# Altium PCB PCB1.PcbDoc
Units mil, origin at the board's own origin, x right, y up, seen from the top; angles counter-clockwise.
Board outline 1425 x 1545 mil, 2 copper layers (Top Layer, Bottom Layer); 12 components, 11 nets, 48 pads, 12 vias.
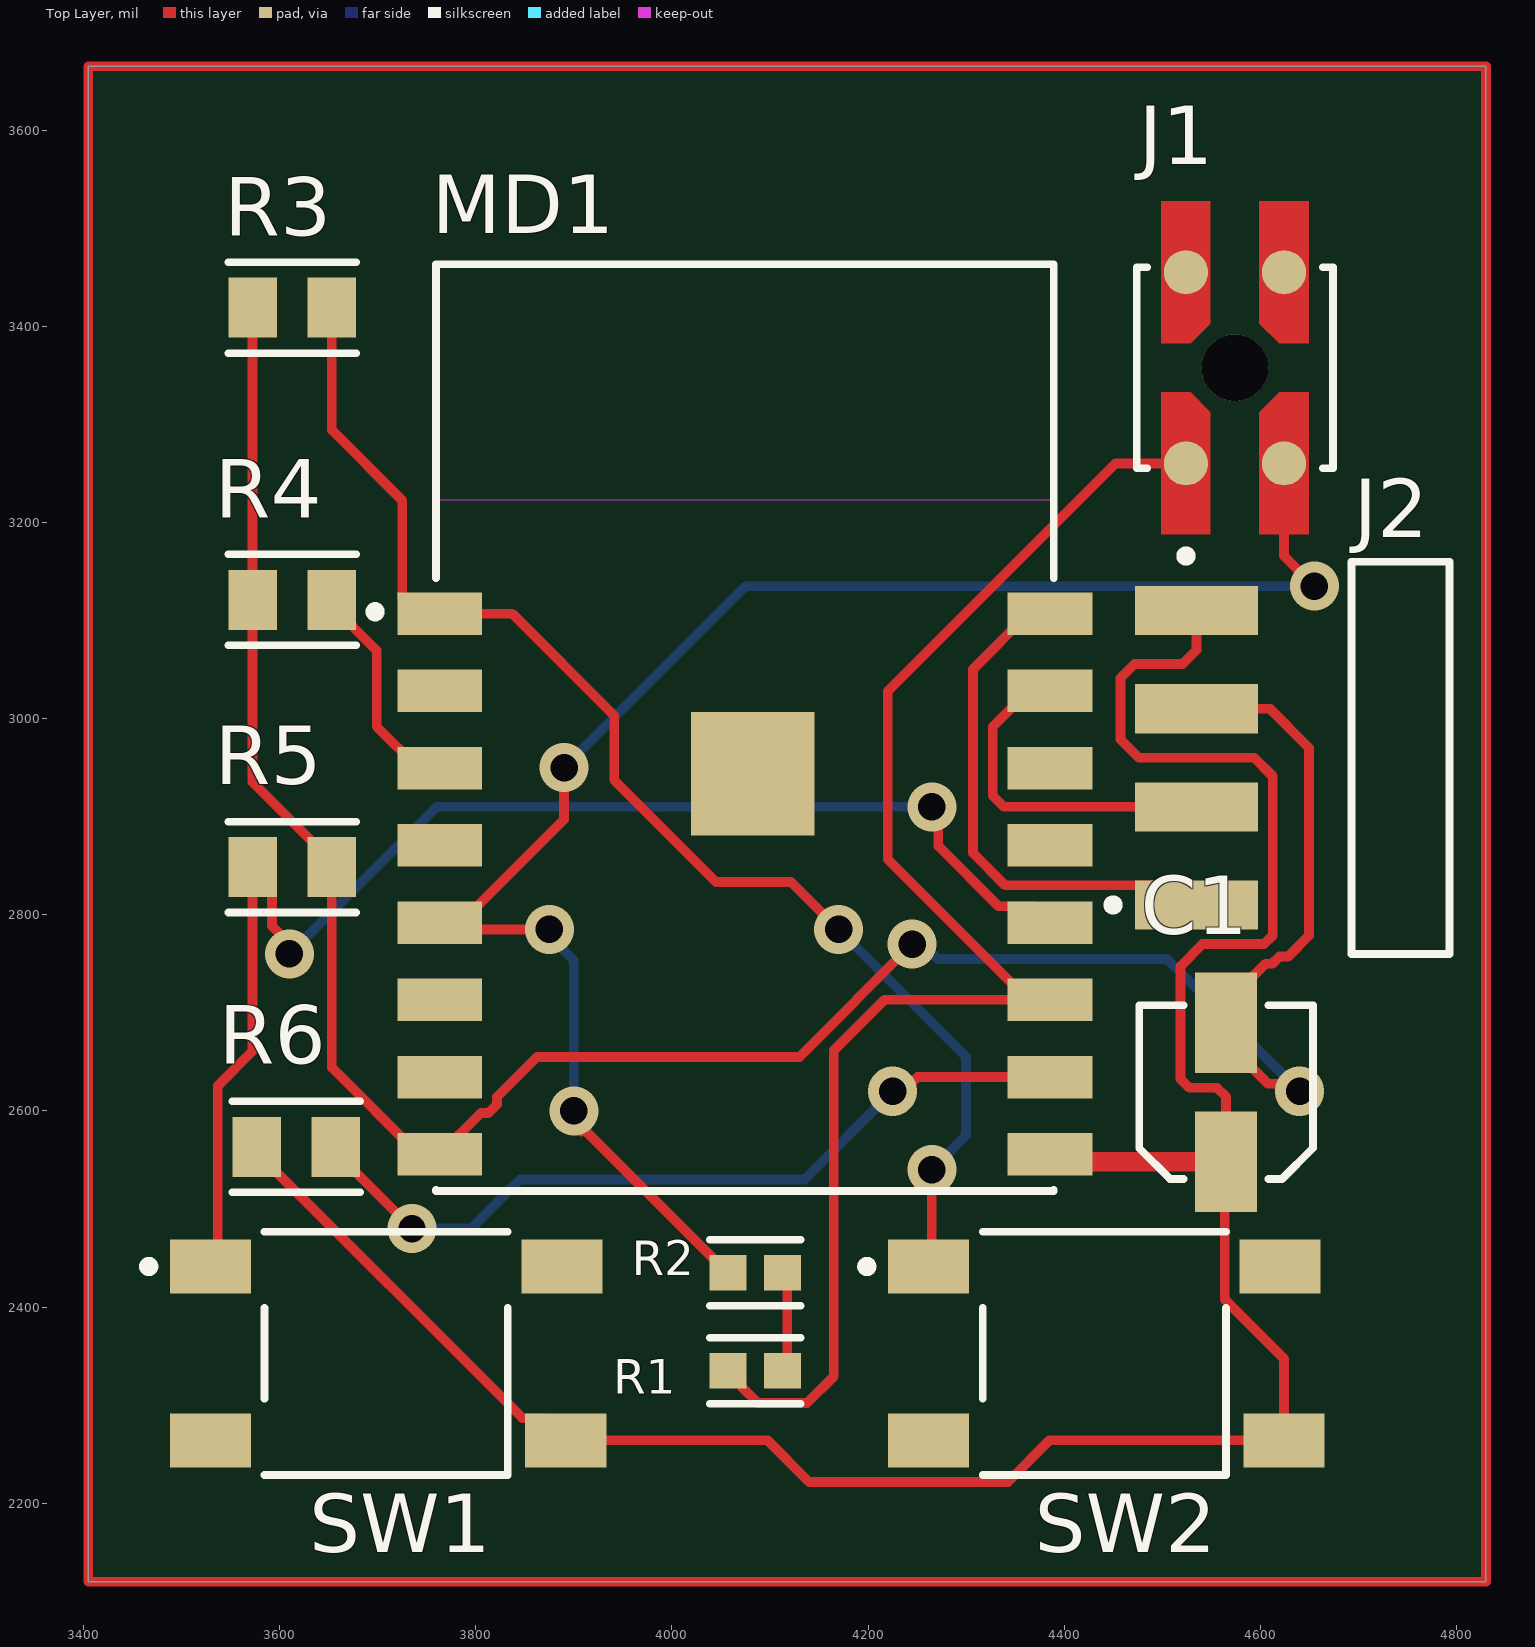
[diagram p0: Top Layer view]
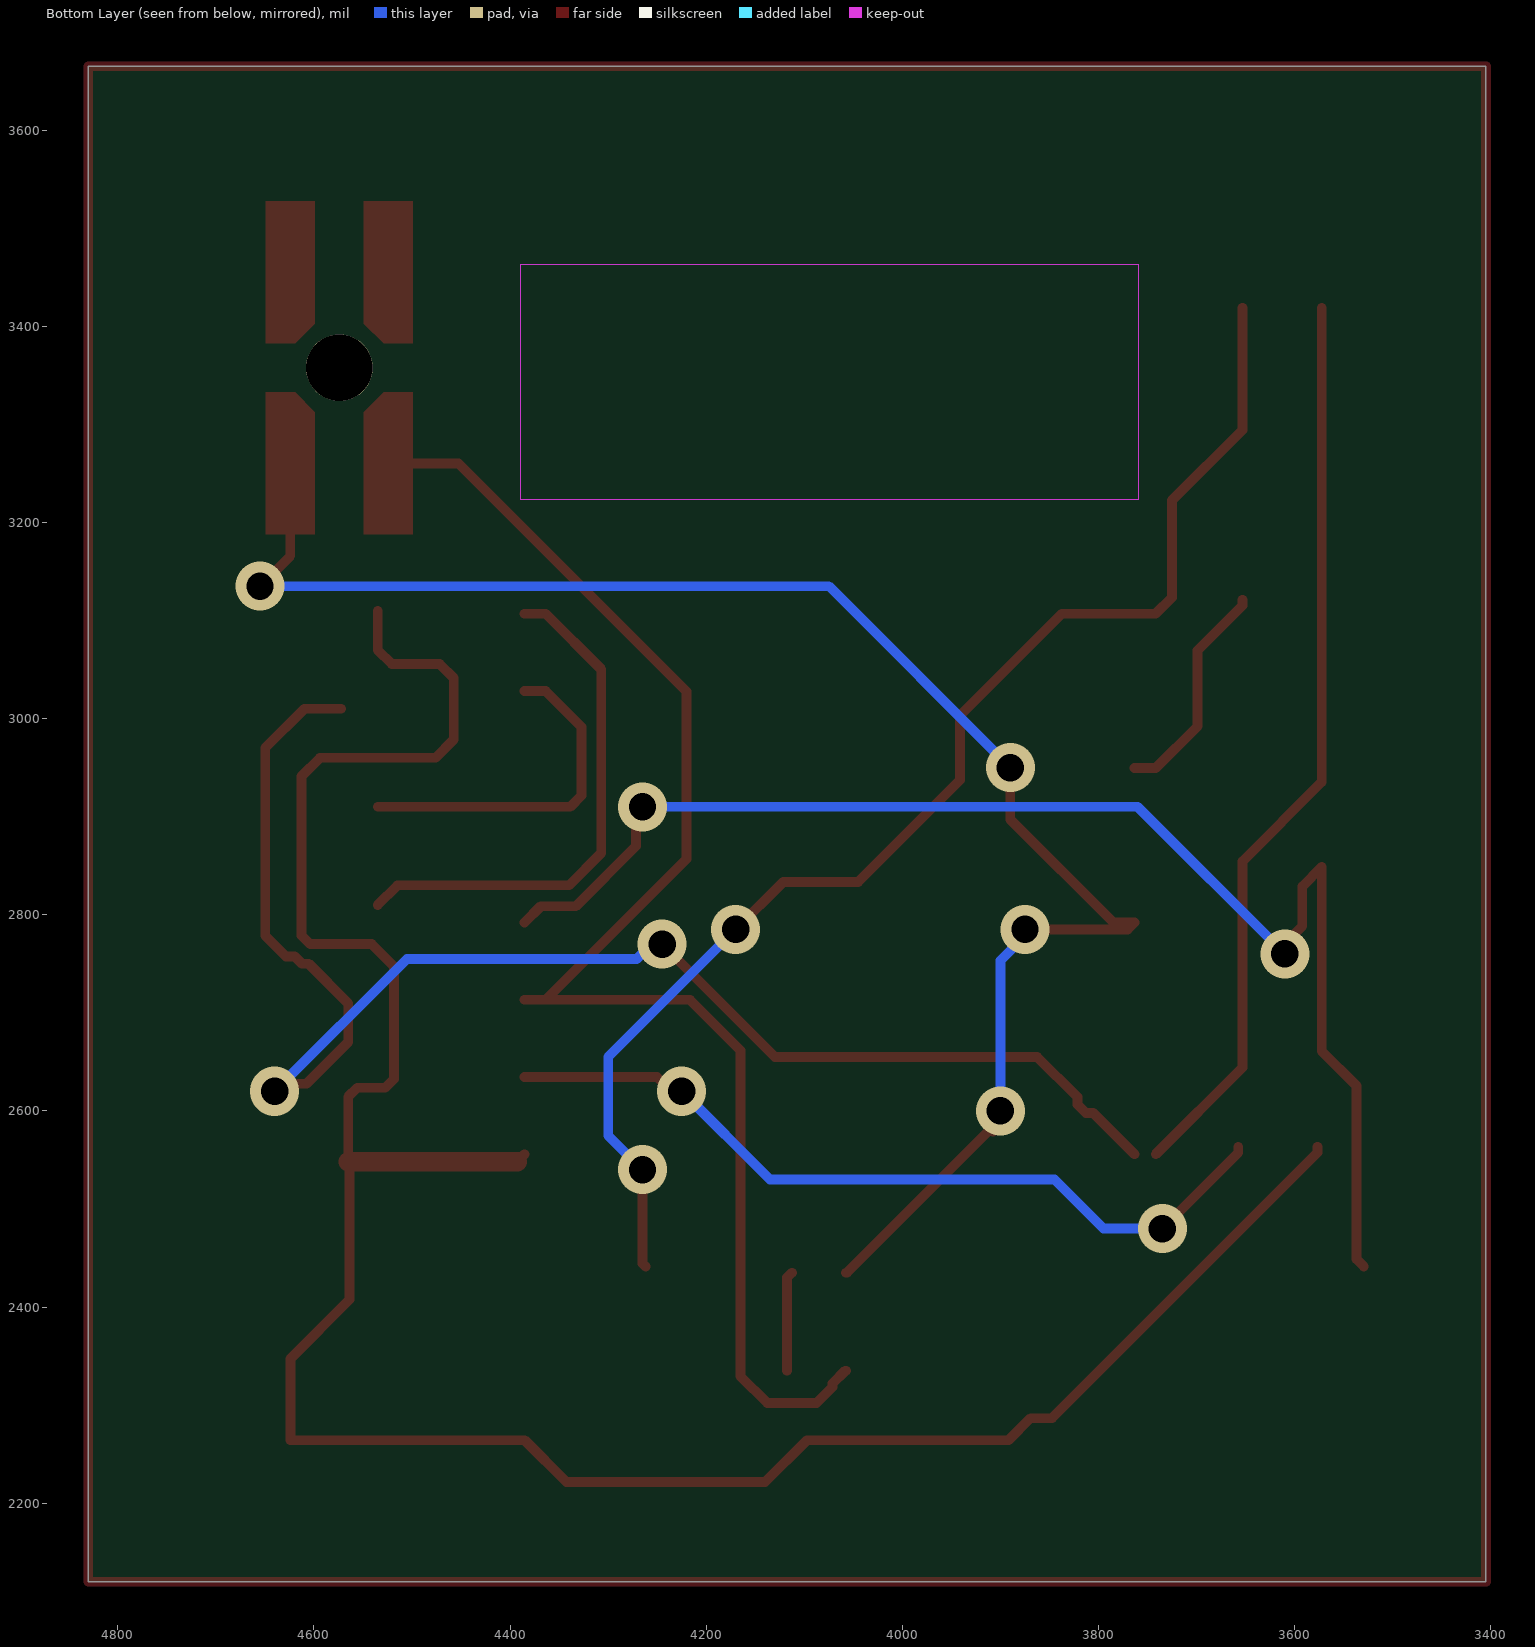
[diagram p1: Bottom Layer view, seen from below]
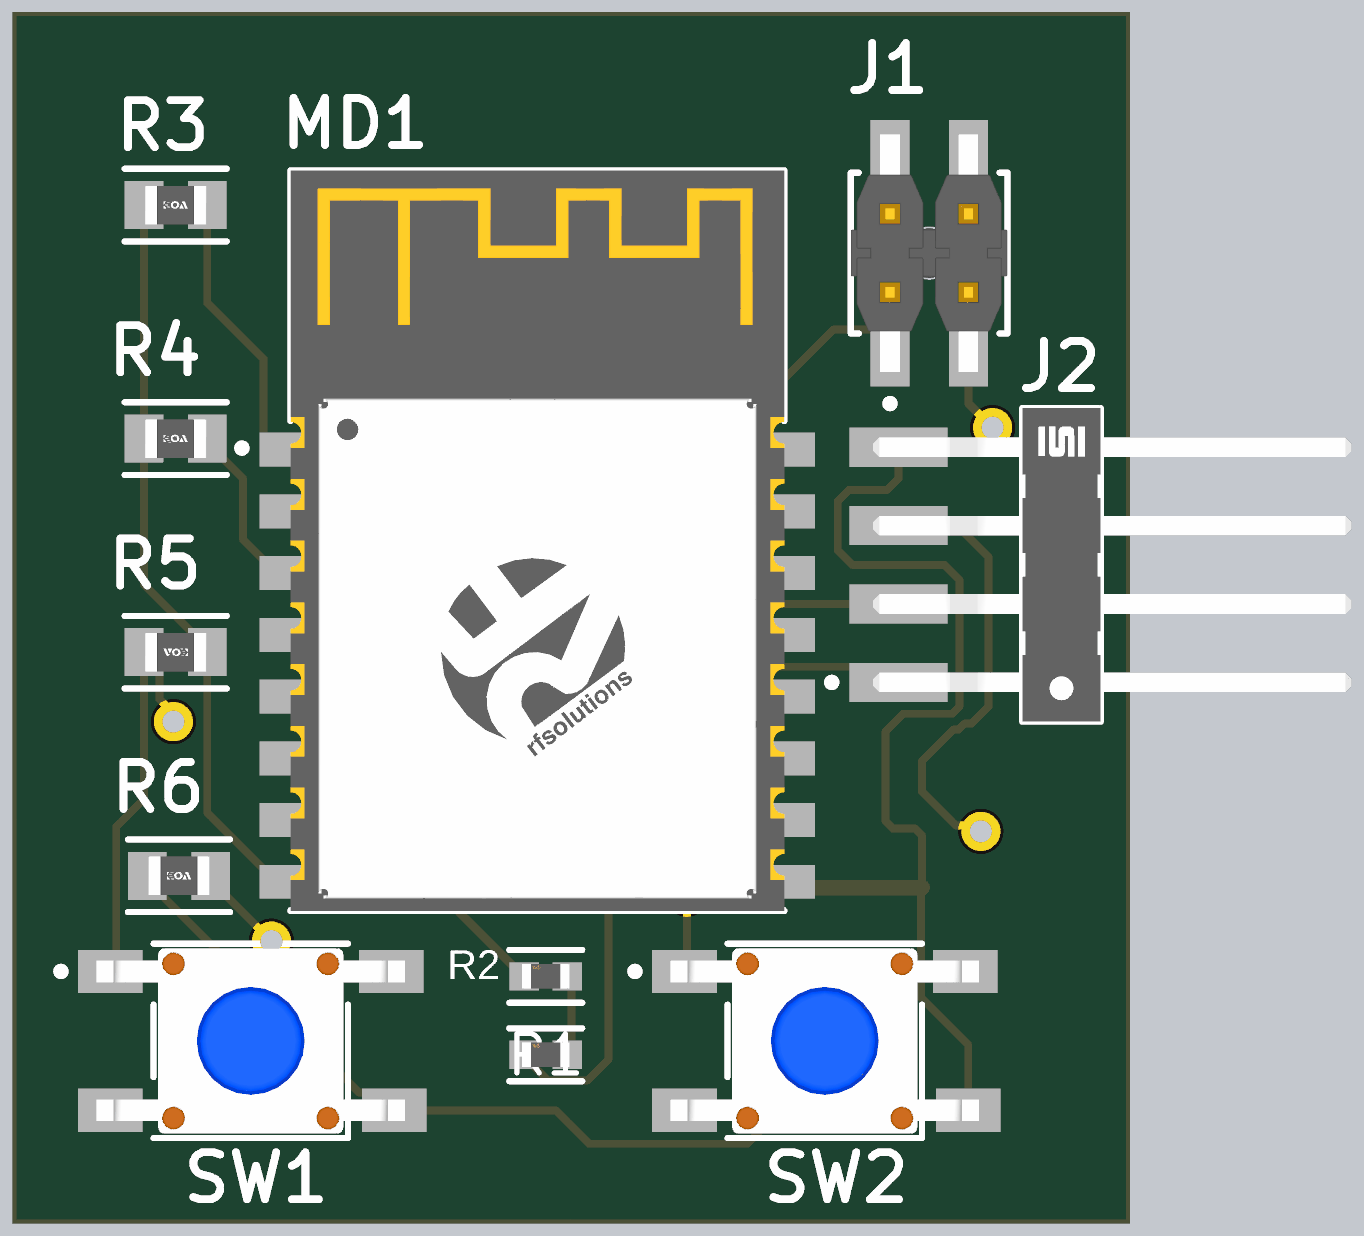
[diagram p2: 3D render of the assembled board from above, using the file's embedded part models]

## Layer stack, top to bottom
Top Solder: solder mask 0.4, Solder Resist, Dk 3.5
Top Layer: signal copper 1.4
Dielectric 1: dielectric 12.6, FR-4, Dk 4.8
Bottom Layer: signal copper 1.4
Bottom Solder: solder mask 0.4, Solder Resist, Dk 3.5

## Board outline
3405,2120 3405,3665 4830,3665 4830,2120

## Design rules (kind name [scope] priority, off if disabled: settings)
Clearance [All] p1: gap=10 ignorepadtopadclearanceinfootprint=FALSE
PolygonConnect [All] p1: connectstyle=Relief reliefconductorwidth=10 reliefentries=4 polygonreliefangle="90 Angle" airgapwidth=10
RoutingVias [All] p1: holewidth=28 width=50 viastyle="Through Hole" minholewidth=28 minwidth=50 maxholewidth=28 maxwidth=50
SolderMaskExpansion [All] p1: expansion=4 istentingtop=FALSE
SupplyNets "Schematic Supply Nets_2" [InNet('+3.3')] p1: voltage=0.000
SupplyNets "Schematic Supply Nets_1" [InNet('GND')] p2: voltage=0.000
SupplyNets "Schematic Supply Nets" [InNet('VCC')] p3: voltage=0.000
Width [All] p1: maxlimit=20 minlimit=10 preferedwidth=10 minimp=50.000000 maximp=50.000000 favimp=50.000000
30 further rules are at their usual default settings.

## Classes and differential pairs
component class Sheet1: C1 J1 MD1 R1 R2 R3 R4 R5 R6 SW1 SW2

## Components (designator, comment, footprint, x,y, rotation, side; value= is the part's Value field where it differs from the comment)
C1 "865250640001" WCAP-ASNP_D4H5.5 54565,-47380.87 r270 top
J1 "TSM-102-01-F-DV-A-P-TR" FP-TSM-102-01-F-DV-A-P-TR-MFG 4574.08,3357.65 r0 top
J2 "TSM-104-02-T-SH-P-TR" FP-TSM-104-02-T-SH-P-TR-MFG 4742.87,2960 r90 top
MD1 "ESP-12S" FP-ESP-12S-MFG 4074.33,2990.79 r0 top
R1 "TFCR0603-10W-C-4701FT" FP-TFCR0603-IPC_B 4085,2335 r0 top
R2 "TFCR0603-10W-C-4701FT" FP-TFCR0603-IPC_B 4085,2435 r0 top
R3 "RN73R2ATTD1002B25" FP-RN73R2A-IPC_A 3612.89,3418.91 r0 top
R4 "RN73R2ATTD1002B25" FP-RN73R2A-IPC_A 3612.89,3121.05 r0 top
R5 "RN73R2ATTD1002B25" FP-RN73R2A-IPC_A 3612.89,2848.54 r180 top
R6 "RN73R2ATTD1002B25" FP-RN73R2A-IPC_A 3617.11,2563.35 r0 top
SW1 "2-1977223-2" FP-2-1977223-2-MFG 3708.66,2352.72 r90 top
SW2 "2-1977223-2" FP-2-1977223-2-MFG 4440.9,2352.72 r90 top

## Footprints (in the part's own frame and the unit in brackets; to place one, negate y for a bottom-side part, rotate by r counter-clockwise, add the part's x,y. Pads: shape width x height; smd on the part's side, far side on the other; paste and mask are expansions set on the pad)
FP-2-1977223-2-MFG [mm]
  rect 1.4x2.1 smd paste+0 mask+0: 1(2.25,4.55) 2(2.25,-4.55) 3(-2.25,4.55) 4(-2.25,-4.65)
  silkscreen extent -3.15,-3.15 3.15,6.27, body extent -3.25,-5.8 3.25,5.7, height 0.25
FP-ESP-12S-MFG [mm]
  rect 2.2x1.1 smd paste+0 mask+0: 1(-7.9,2.95) 2(-7.9,0.95) 3(-7.9,-1.05) 4(-7.9,-3.05) 5(-7.9,-5.05) 6(-7.9,-7.05) 7(-7.9,-9.05) 8(-7.9,-11.05) 9(7.9,-11.05) 10(7.9,-9.05) 11(7.9,-7.05) 12(7.9,-5.05) 13(7.9,-3.05) 14(7.9,-1.05) 15(7.9,0.95) 16(7.9,2.95)
  rect 3.2x3.2 smd paste+0 mask+0: 17(0.2,-1.2)
  Keep-Out Layer region: -8,5.9 8,5.9 8,12 -8,12
  Keep-Out Layer region: -8,5.9 8,5.9 8,12 -8,12
  silkscreen extent -9.7,-12 8,12, body extent -9.1,-12.1 9.1,12.1, height 0.25
FP-RN73R2A-IPC_A [mil]
  rect 49.42x61.27 smd paste+0 mask+0: 1(-40.37,0) 2(40.37,0)
  silkscreen extent -65,-46 65,46, body extent -85,-50 85,50, height 10
FP-TFCR0603-IPC_B [mil]
  rect 37.72x35.91 smd paste+0 mask+0: 1(-27.64,0) 2(27.64,0)
  silkscreen extent -46,-34 46,34, body extent -56,-28 56,28, height 10
FP-TSM-102-01-F-DV-A-P-TR-MFG [mil]
  round 45 smd paste+0 mask+0: 1(-50,-97.44) 2(-50,97.44) 3(50,-97.44) 4(50,97.44)
  round 68.11 hole 68.11 unplated paste-99999 mask+0: ""(0,0)
  Top Layer region: -75,-25 -45.08,-25 -25,-45.08 -25,-169.88 -75,-169.88
  Top Layer region: 25,-45.08 45.08,-25 75,-25 75,-169.88 25,-169.88
  Top Layer region: 25,45.08 45.08,25 75,25 75,169.88 25,169.88
  Top Layer region: -75,25 -45.08,25 -25,45.08 -25,169.88 -75,169.88
  silkscreen extent -100,-197 100,103, body extent -104,-174 104,174, height 10
FP-TSM-104-02-T-SH-P-TR-MFG [mm]
  rect 1.27x3.18 smd paste+0 mask+0: 1(-3.81,5.28) 2(-1.27,5.28) 3(1.27,5.28) 4(3.81,5.28)
  silkscreen extent -5.08,-1.27 5.08,7.57, body extent -5.18,-9.7 5.18,6.97, height 0.25
WCAP-ASNP_D4H5.5 [mm] "Aluminum Electrolytic Capacitors, 4x5.5mm"
  rect 2.6x1.6 smd: 1(-1268.2,-1270) 2(-1271.8,-1270)
  silkscreen extent -1272.25,-1272.25 -1267.75,-1267.75, body extent -1272.5,-1272.15 -1267.5,-1267.85, height 5.5

## Part data
C1: library part CMP-03913-53758718-2, "WCAP-ASNP Aluminum Electrolytic Capacitors", Capacitance=100nF, Case/Package=Radial, Insulation Resistance=16.6667MΩ, Leakage Current=10µA, Max Operating Temperature=85°C, Min Operating Temperature=-40°C, Ripple Current=1mA, Tolerance=20%, Voltage Rating=50V, Diameter=4mm, Height=5.5mm, Height - Seated (Max)=5.5118mm, Impedance=20.6814Ω, Length=5.5mm, Life (Hours)=2000hours, Mount="Surface Mount", Polarity=Polar, REACH SVHC=Unknown, Ripple Current (AC)=1mA, RoHS=Compliant, Voltage Rating (DC)=50V, Width=4.3mm
J1: library part CMP-00575-51787786-1, "TSM-102-01-F-DV-A-P-TR .100\" Surface Mount Terminal Strip Rohs Compliant: Yes", Manufacturer Lifecycle Status=PRODUCTION, Max Operating Temperature=125°C, Min Operating Temperature=-55°C, Contact Material="Gold, Nickel", Height=10.16mm, Lead Free="Lead Free", Lifecycle Status=Production, NexarPartId=51787786, Number of Contacts=4, Number of Rows=2, Packaging="Tape and Reel", RoHS=Compliant
J2: library part CMP-02766-000097-1, "CONN HEADER SMD R/A 4POS 2.54MM", Housing Color=Black, Max Current Rating=7A, Max Operating Temperature=105°C, Max Voltage Rating (AC)=475V, Min Operating Temperature=-55°C, Contact Material=Bronze, Contact Plating=Tin, Depth=13.46mm, Gender=Male, Housing Material=Polymer, Lead Free="Lead Free", Length=10.16mm, Number of Contacts=4, Number of Rows=1, Orientation="Right Angle", Packaging="Tape and Reel", Pitch=2.54mm, Radiation Hardening=No, Termination=Solder
MD1: library part CMP-204316-000002-1, "RX TXRX MOD WIFI PCB TRACE SMD", Frequency=2.484GHz, Data Rate=54Mbps, Interface=I2C, Sensitivity=-90dBm, Series=-
R1 R2: library part CMP-250906-287647-1, "RES Thin Film,  4.7kΩ, 1%, 0.1W, 50ppm/°C, 0603"
R3 R4 R5 R6: library part CMP-04015-052084-1, "RES 10K OHM 0.1% 1/8W 0805"
SW1 SW2: library part CMP-03407-000026-1, "SWITCH TACTILE SPST-NO 0.05A 24V", RoHS Compliant=Yes

## Via types
v1: diameter 50, hole 28, Top Layer to Bottom Layer, 12 vias

## Nets (pads, with @x,y where several pads share a name; then routed paths per layer and width w, separated by ;. In a path a pad name is that pad's centre, name@x,y a point inside that pad or via, vN(x,y) a via of type N, cw(c..) or ccw(c..) an arc to the next point about the centre after c; other vN are vias at no path point)
+3.3: C1.2 J2.3 MD1.8 R3.1 R4.1 R5.1 | length 2499.1
  Top Layer w10: R3.1 R4.1 3572.51,2935.21 3653.26,2854.46 R5.1 3653.26,2644.14 MD1.8@3741.65,2555.75 ; MD1.8 3805.39,2597.83 3812.83,2597.83 3821.61,2606.62 3821.61,2614.06 3862.56,2655 4130,2655 v1(4245,2770) ; J2.3@4572.13,3010 4609.72,3010 4649.72,2970 4649.72,2778.79 4628.42,2757.48 4619.58,2757.48 4612.1,2750 4605.31,2750 4565,2709.68 C1.2 4565,2670.32 4607.66,2627.65 4632.35,2627.65 v1(4640,2620)
  Bottom Layer w10: v1(4245,2770) 4255.82,2770 4270.82,2755 4505,2755 v1(4640,2620)
GND: C1.1 J2.4 MD1.9 R6.1 SW1.4 SW2.4 | length 2569.5
  Top Layer w10: R6.1 3576.74,2557.42 3847.46,2286.7 3869.18,2286.7 SW1.4 4097.42,2264.14 4139.98,2221.58 4342.52,2221.58 4385.08,2264.14 SW2.4 4623.97,2347.26 4563.7,2407.53 4563.7,2546.96 C1.1 4565,2614.45 4555.92,2623.53 4527.58,2623.53 4518.5,2632.61 4518.5,2747.39 4541.11,2770 4603.81,2770 4612.6,2778.79 4612.6,2941.21 4593.81,2960 4476.19,2960 4457.4,2978.79 4457.4,3041.21 4471.79,3055.61 4520.61,3055.61 4535,3070 J2.4 ; MD1.9 MD1.9@4392.83,2548.27
  Top Layer w20: MD1.9@4392.83,2548.27 C1.1
NetJ1_1: J1.1 MD1.11 R1.1 | length 1483.2
  Top Layer w10: R1.1 4058.27,2335 4071.22,2322.04 4071.22,2318.38 4087.56,2302.04 4137.71,2302.04 4165,2329.33 4165,2661.72 4216.51,2713.23 MD1.11@4363.7,2713.23 ; MD1.11 MD1.11@4363.7,2713.23 ; J1.1 4452.46,3260.21 4220,3027.75 4220,2856.93 MD1.11@4363.7,2713.23
NetJ1_3: J1.3 MD1.5 R2.1 | length 1741.4
  Top Layer w10: v1(3875,2785) 3770.28,2785 MD1.5 3784.96,2791.97 3890,2897.01 v1(3890,2950) ; v1(3900,2600) 3907.65,2592.35 v1@3907.65,2578.8 ; v1@3912.65,2578.8 4056.46,2435 R2.1 ; J1.3 4624.08,3165.92 v1(4655,3135)
  Bottom Layer w10: v1(3875,2785) 3875,2778.43 3900,2753.43 v1(3900,2600) ; v1(3890,2950) 4075,3135 v1(4655,3135)
NetJ2_1: J2.1 MD1.16 | length 539
  Top Layer w10: MD1.16 4363.7,3106.93 4307.05,3050.28 4307.05,2862.84 4339.89,2830 4515,2830 J2.1
NetJ2_2: J2.2 MD1.15 | length 356.2
  Top Layer w10: MD1.15 4363.7,3028.19 4327.05,2991.54 4327.05,2921.58 4338.63,2910 J2.2
NetMD1_1: MD1.1 R3.2 SW2.1 | length 1362.1
  Top Layer w10: R3.2 3653.26,3294.3 3725,3222.56 3725,3123.58 3741.65,3106.93 MD1.1 3837.25,3106.93 3941.15,3003.03 3941.15,2937.4 4045.05,2833.5 4121.5,2833.5 v1(4170,2785) ; SW2.1 4265,2444.54 v1(4265,2540)
  Bottom Layer w10: v1(4170,2785) 4300,2655 4300,2575 v1(4265,2540)
NetMD1_3: MD1.3 R4.2 | length 229.9
  Top Layer w10: R4.2 3653.26,3115.13 3698.99,3069.4 3698.99,2992.12 3741.65,2949.45 MD1.3
NetMD1_10: MD1.10 R6.2 | length 829.9
  Top Layer w10: R6.2 3657.49,2557.42 3734.91,2480 v1(3735,2480) ; v1(4225,2620) 4235.82,2620 4250.31,2634.49 MD1.10
  Bottom Layer w10: v1(3735,2480) 3795,2480 3845,2530 4135,2530 v1(4225,2620)
NetMD1_12: MD1.12 R5.2 SW1.1 | length 1435
  Top Layer w10: SW1.1 3537.03,2448.81 3537.03,2625.64 3572.51,2661.13 R5.2 3592.22,2828.83 3592.22,2788.6 3610,2770.82 v1(3610,2760) ; v1(4265,2910) 4271.6,2903.4 4271.6,2870 4332.98,2808.62 4368.7,2808.62 MD1.12
  Bottom Layer w10: v1(3610,2760) 3760,2910 v1(4265,2910)
VCC: R1.2 R2.2 | length 102.1
  Top Layer w10: R2.2 4117.64,2430 R1.2@4117.64,2335
pads on no net: J1. J1.2 J1.4 MD1.2 MD1.4 MD1.6 MD1.7 MD1.13 MD1.14 MD1.17 SW1.2 SW1.3 SW2.2 SW2.3
copper on no net: | length 5940
  Top Layer w10: 3405,2120 4830,2120 4830,3665 3405,3665 3405,2120